# EAGLE board outin_shield_ichigojam (EAGLE 7.4.0)
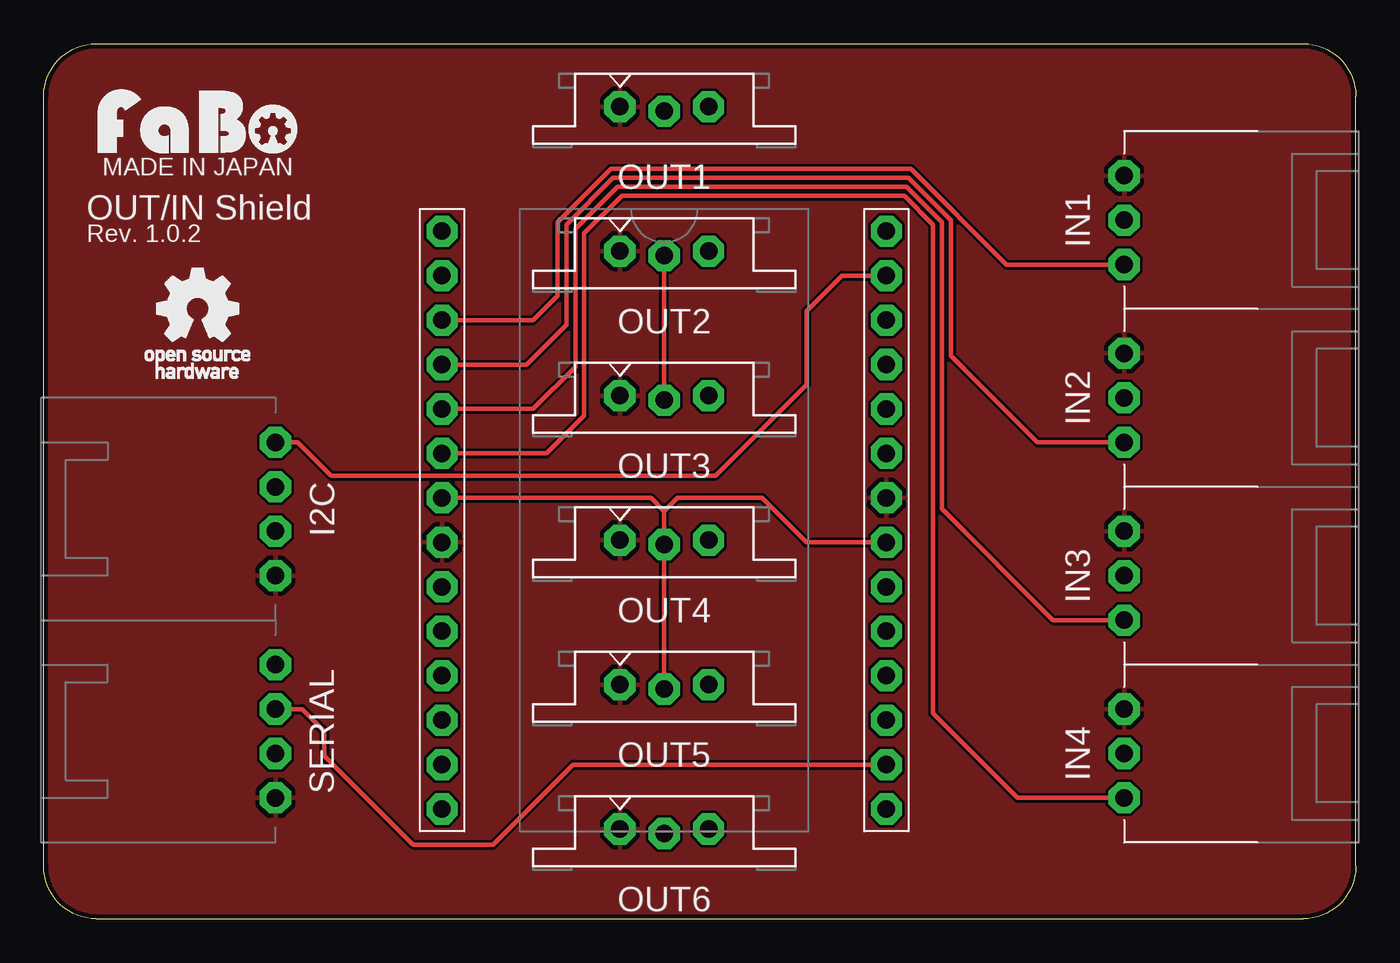
[diagram p0: board, top side]
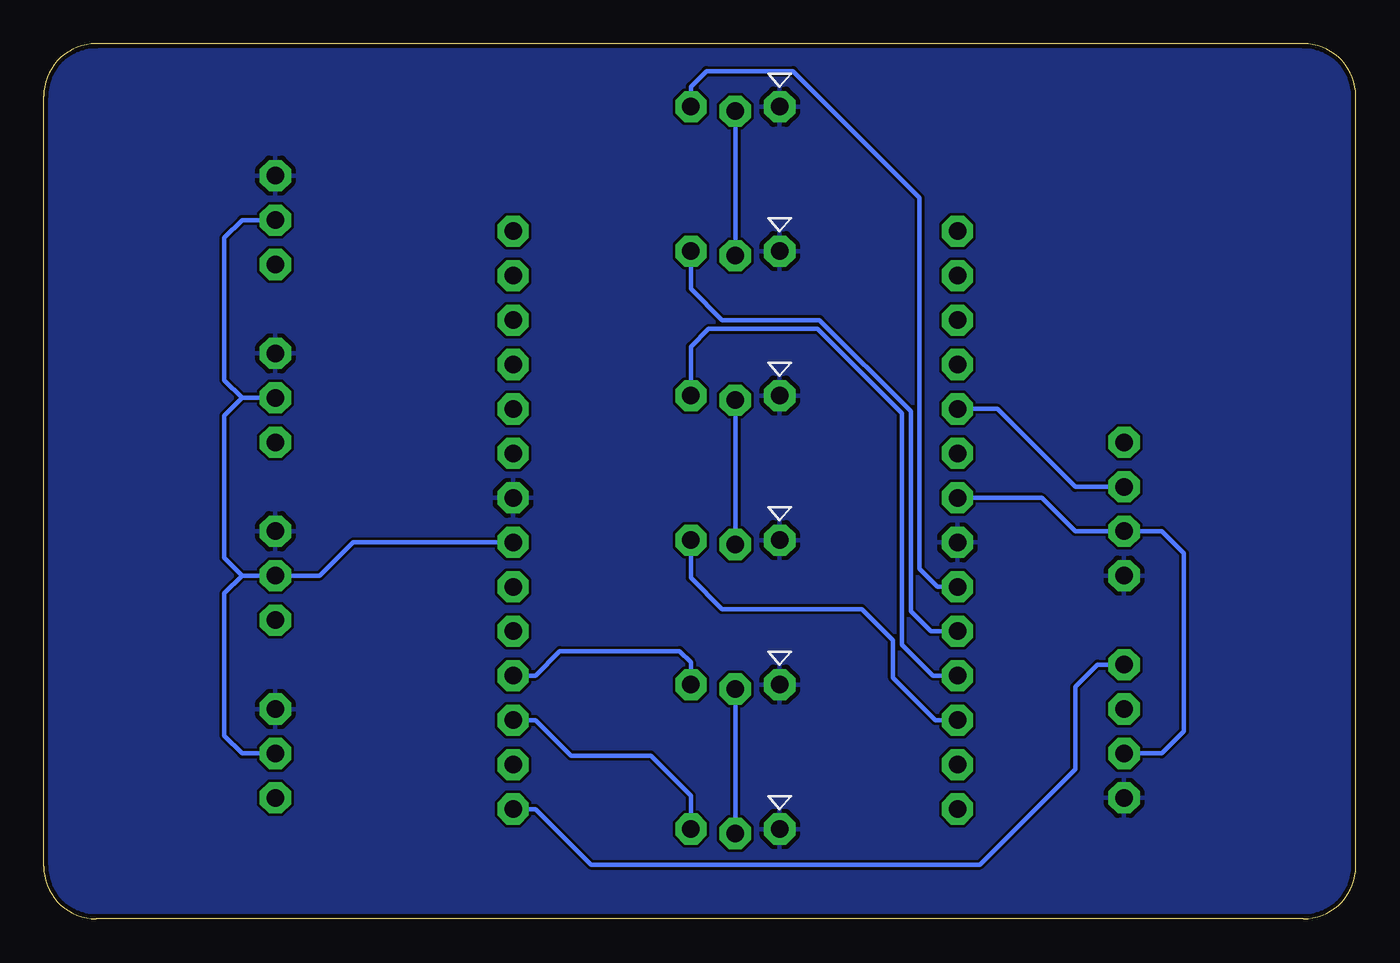
[diagram p1: board, bottom side, seen from below]

Size 75 x 50 mm. Coordinates in mm from the lower left corner, seen from the top.
Copper layers (1*16): Top 0.035mm / dielectric 1.5mm / Bottom 0.035mm
Design rules "Elecrow_2-layer_eagle_rule": minimum track width 6mil, minimum drill 12mil, track to track 6mil, track to pad 6mil, pad to pad 6mil, via to via 6mil, smd to smd 0mil, copper to edge 10mil, drill to drill 10mil, minimum pad ring 10mil, minimum via ring 6mil, stop-mask expansion 2mil, vias tented up to drill 100mil, thermal gap 10mil

## Footprints (pad centres in the part's own frame; a part is rotated, then mirrored left to right if it is on the bottom)
FABO_BRICK_I2C_CONNECTOR = drill 1 pad 1.778 octagon: GND -3.81,0; SCL 3.81,0; SDA 1.27,0; VCC -1.27,0
FABO_BRICK_3PIN_CONNECTOR = drill 1 pad 1.778 octagon: GND -2.54,0; IN/OUT 2.54,0; VCC 0,0
FABO_BRICK_3PIN_HEADER = drill 1 pad 1.778 octagon: GND -2.54,0.127; I/O 2.54,0.127; VCC 0,-0.127
FABO_BRICK_SERIAL_CONNECTOR = drill 1 pad 1.778 octagon: GND -3.81,0; RX 3.81,0; TX 1.27,0; VCC -1.27,0
ICHIGOJAM_U_NOLABEL = drill 1 pad 1.778 octagon: BTN -12.7,-13.97; EX1 12.7,13.97; GND8 -12.7,-1.27; GND22 12.7,1.27; IN1 -12.7,11.43; IN2 -12.7,8.89; IN3 -12.7,6.35; IN4 -12.7,3.81; ISP 12.7,6.35; KBD1 12.7,16.51; KBD2 12.7,11.43; LED -12.7,-16.51; OUT1 -12.7,-3.81; OUT2 -12.7,-6.35; OUT3 -12.7,-8.89; OUT4 -12.7,-11.43; OUT5 12.7,-8.89; OUT6 12.7,-11.43; RESET 12.7,3.81; RXD 12.7,-16.51; SOUND 12.7,8.89; TXD 12.7,-13.97; VCC7 -12.7,1.27; VCC21 12.7,-1.27; VIDEO1 -12.7,16.51; VIDEO2 -12.7,13.97; XTAL1 12.7,-6.35; XTAL2 12.7,-3.81

## Placement (x,y rotation side)
I2C  [FABO_BRICK_I2C_CONNECTOR]  13.25,23.41 90 top
IN1  [FABO_BRICK_3PIN_CONNECTOR]  61.76,39.92 270 top
IN2  [FABO_BRICK_3PIN_CONNECTOR]  61.76,29.77 270 top
IN3  [FABO_BRICK_3PIN_CONNECTOR]  61.76,19.61 270 top
IN4  [FABO_BRICK_3PIN_CONNECTOR]  61.76,9.45 270 top
OUT1  [FABO_BRICK_3PIN_HEADER]  35.47,46.28 0 top
OUT2  [FABO_BRICK_3PIN_HEADER]  35.47,38.02 0 top
OUT3  [FABO_BRICK_3PIN_HEADER]  35.47,29.77 0 top
OUT4  [FABO_BRICK_3PIN_HEADER]  35.47,21.51 0 top
OUT5  [FABO_BRICK_3PIN_HEADER]  35.47,13.26 0 top
OUT6  [FABO_BRICK_3PIN_HEADER]  35.47,5 0 top
SERIAL  [FABO_BRICK_SERIAL_CONNECTOR]  13.25,10.71 90 top
U1  [ICHIGOJAM_U_NOLABEL]  35.47,22.78 0 top
U$2  [LOGO_OSHW_T_M]  8.8,34.84 0 top
U$3  [LOGO_FABO_M]  8.8,43.73 0 top

## Library data of the parts
I2C IN1-IN4 OUT1-OUT6 SERIAL = FaBo-Template
U1 = FaBo-Boards
U$2 U$3 = FaBo-etc

## Nets
3V3: I2C.VCC IN1.VCC IN2.VCC IN3.VCC IN4.VCC OUT1.VCC OUT2.VCC OUT3.VCC OUT4.VCC OUT5.VCC OUT6.VCC SERIAL.VCC U1.VCC7 U1.VCC21
GND: I2C.GND IN1.GND IN2.GND IN3.GND IN4.GND OUT1.GND OUT2.GND OUT3.GND OUT4.GND OUT5.GND OUT6.GND SERIAL.GND U1.GND8 U1.GND22
IN1: IN1.IN/OUT U1.IN1
IN2: IN2.IN/OUT U1.IN2
IN3: I2C.SDA IN3.IN/OUT U1.IN3
IN4: IN4.IN/OUT U1.IN4
OUT1: OUT1.I/O U1.OUT1
OUT2: OUT2.I/O U1.OUT2
OUT3: OUT3.I/O U1.OUT3
OUT4: OUT4.I/O U1.OUT4
OUT5: OUT5.I/O U1.OUT5
OUT6: OUT6.I/O U1.OUT6
RX: SERIAL.RX U1.RXD
SCL: I2C.SCL U1.EX1
TX: SERIAL.TX U1.TXD

## Tracks (layer width: path | path; a pad name or v marks a point on that pad's centre or on a via)
3V3
  Top 0.254: OUT3.VCC OUT2.VCC | OUT5.VCC OUT4.VCC 35.47,23.29 | 35.47,23.29 36.23,24.05 41.06,24.05 43.6,21.51 U1.VCC21 | U1.VCC7 34.71,24.05 35.47,23.29
  Bottom 0.254: OUT1.VCC OUT2.VCC | OUT3.VCC OUT4.VCC | OUT6.VCC OUT5.VCC | SERIAL.VCC 11.09,9.45 9.82,10.71 9.82,20.88 11.09,22.14 I2C.VCC 16.04,22.14 17.94,24.05 U1.VCC7 | IN1.VCC 63.66,39.92 64.68,38.91 64.68,30.78 63.66,29.77 | IN2.VCC 63.66,29.77 | 63.66,29.77 64.68,28.75 64.68,20.62 63.66,19.61 | 63.66,19.61 IN3.VCC 59.22,19.61 57.31,21.51 U1.VCC21 | 63.66,19.61 64.68,18.59 64.68,10.46 63.66,9.45 IN4.VCC
GND
  pour Bottom: -2.63,-1.98 76.11,-1.98 76.11,51.36 -2.63,51.36
  pour Top: -2.63,-1.98 76.11,-1.98 76.11,51.36 -2.63,51.36
IN1
  Top 0.254: U1.IN1 27.98,34.21 29.37,35.61 29.37,39.8 32.42,42.85 49.57,42.85 55.03,37.39 IN1.IN/OUT
IN2
  Top 0.254: U1.IN2 27.6,31.67 29.88,33.96 29.88,39.67 32.55,42.34 49.44,42.34 51.85,39.92 51.85,32.18 56.81,27.23 IN2.IN/OUT
IN3
  Top 0.254: U1.IN3 27.98,29.13 30.39,31.54 30.39,39.42 32.8,41.83 49.31,41.83 51.34,39.8 51.34,23.41 57.7,17.07 IN3.IN/OUT
  Bottom 0.254: I2C.SDA 16.04,24.68 20.48,29.13 U1.IN3
IN4
  Top 0.254: U1.IN4 28.74,26.59 30.9,28.75 30.9,39.16 33.06,41.32 49.19,41.32 50.84,39.67 50.84,11.73 55.66,6.91 IN4.IN/OUT
OUT1
  Bottom 0.254: OUT1.I/O 38.01,47.55 37.12,48.43 32.17,48.43 24.93,41.19 24.93,19.99 23.91,18.97 U1.OUT1
OUT2
  Bottom 0.254: U1.OUT2 24.29,16.43 25.44,17.57 25.44,29 30.64,34.21 36.23,34.21 38.01,35.99 OUT2.I/O
OUT3
  Bottom 0.254: OUT3.I/O 38.01,32.69 36.99,33.7 30.77,33.7 25.95,28.88 25.95,15.67 24.17,13.89 U1.OUT3
OUT4
  Bottom 0.254: U1.OUT4 24.04,11.35 26.45,13.76 26.45,15.92 28.23,17.7 36.23,17.7 38.01,19.48 OUT4.I/O
OUT5
  Bottom 0.254: U1.OUT5 46.9,13.89 45.5,15.29 38.65,15.29 38.01,14.65 OUT5.I/O
OUT6
  Bottom 0.254: OUT6.I/O 38.01,7.03 40.3,9.32 44.87,9.32 46.9,11.35 U1.OUT6
RX
  Bottom 0.254: U1.RXD 46.9,6.27 43.73,3.1 21.5,3.1 16.04,8.56 16.04,13.26 14.77,14.53 SERIAL.RX
SCL
  Top 0.254: I2C.SCL 14.52,27.23 16.42,25.32 38.39,25.32 43.6,30.53 43.6,34.72 45.63,36.75 U1.EX1
TX
  Top 0.254: SERIAL.TX 14.77,11.98 16.04,10.71 16.04,9.32 21.12,4.24 25.69,4.24 30.26,8.81 U1.TXD

## Text on the board
tPlace: MADE IN JAPAN | OUT/IN Shield | Rev. 1.0.2